# Altium PCB super cap2.PcbDoc
Units mm, origin at the board's own origin, x right, y up, seen from the top; angles counter-clockwise.
Board outline 40 x 41.5 mm, 2 copper layers (Top Layer, Bottom Layer), stack 0.325 mm thick; 54 components, 33 nets, 195 pads, 26 vias.
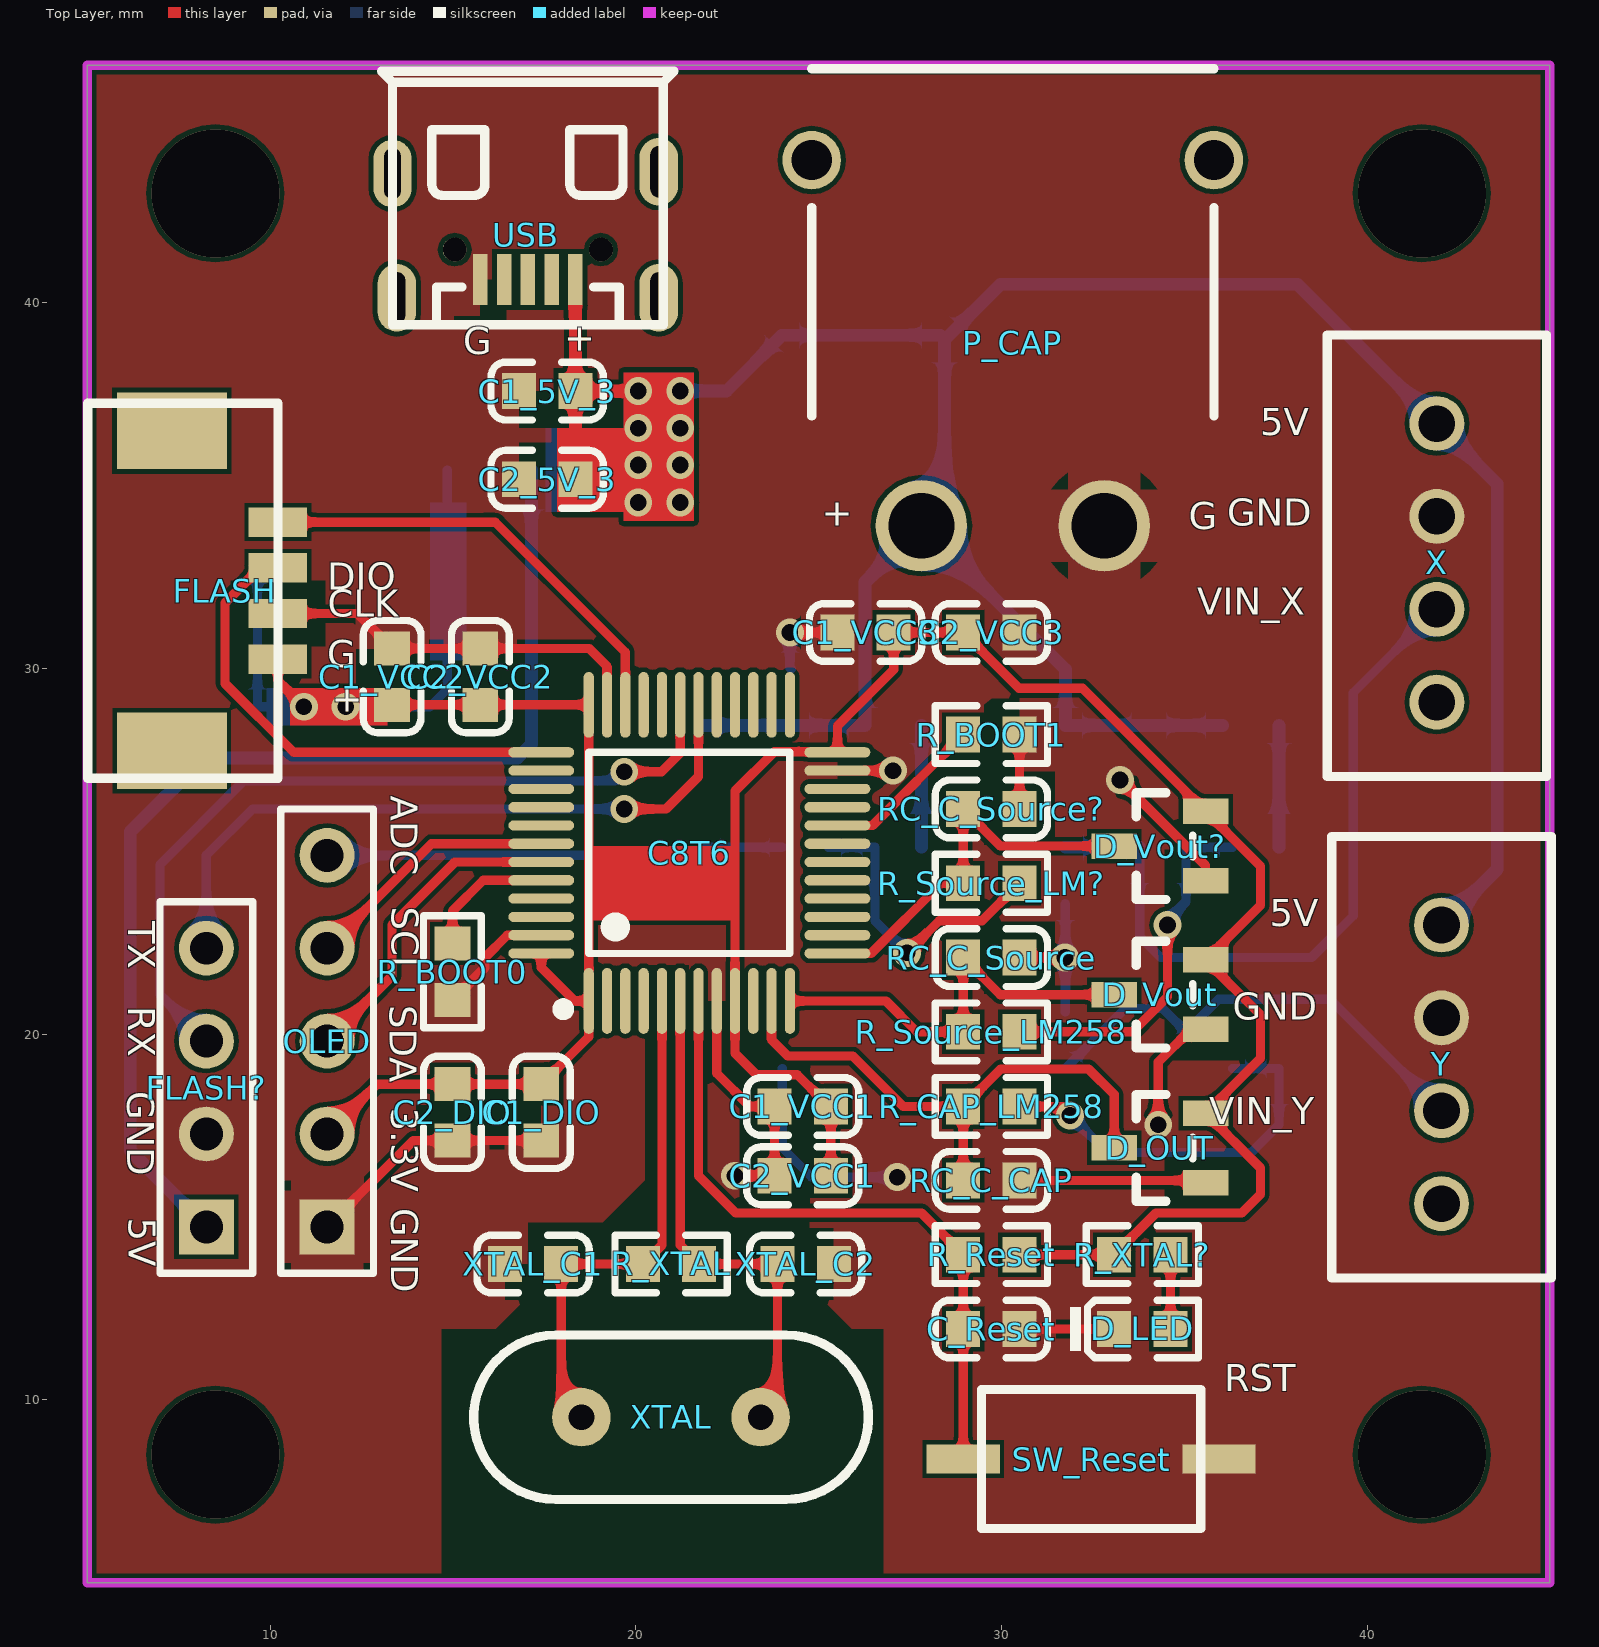
[diagram p0: Top Layer view]
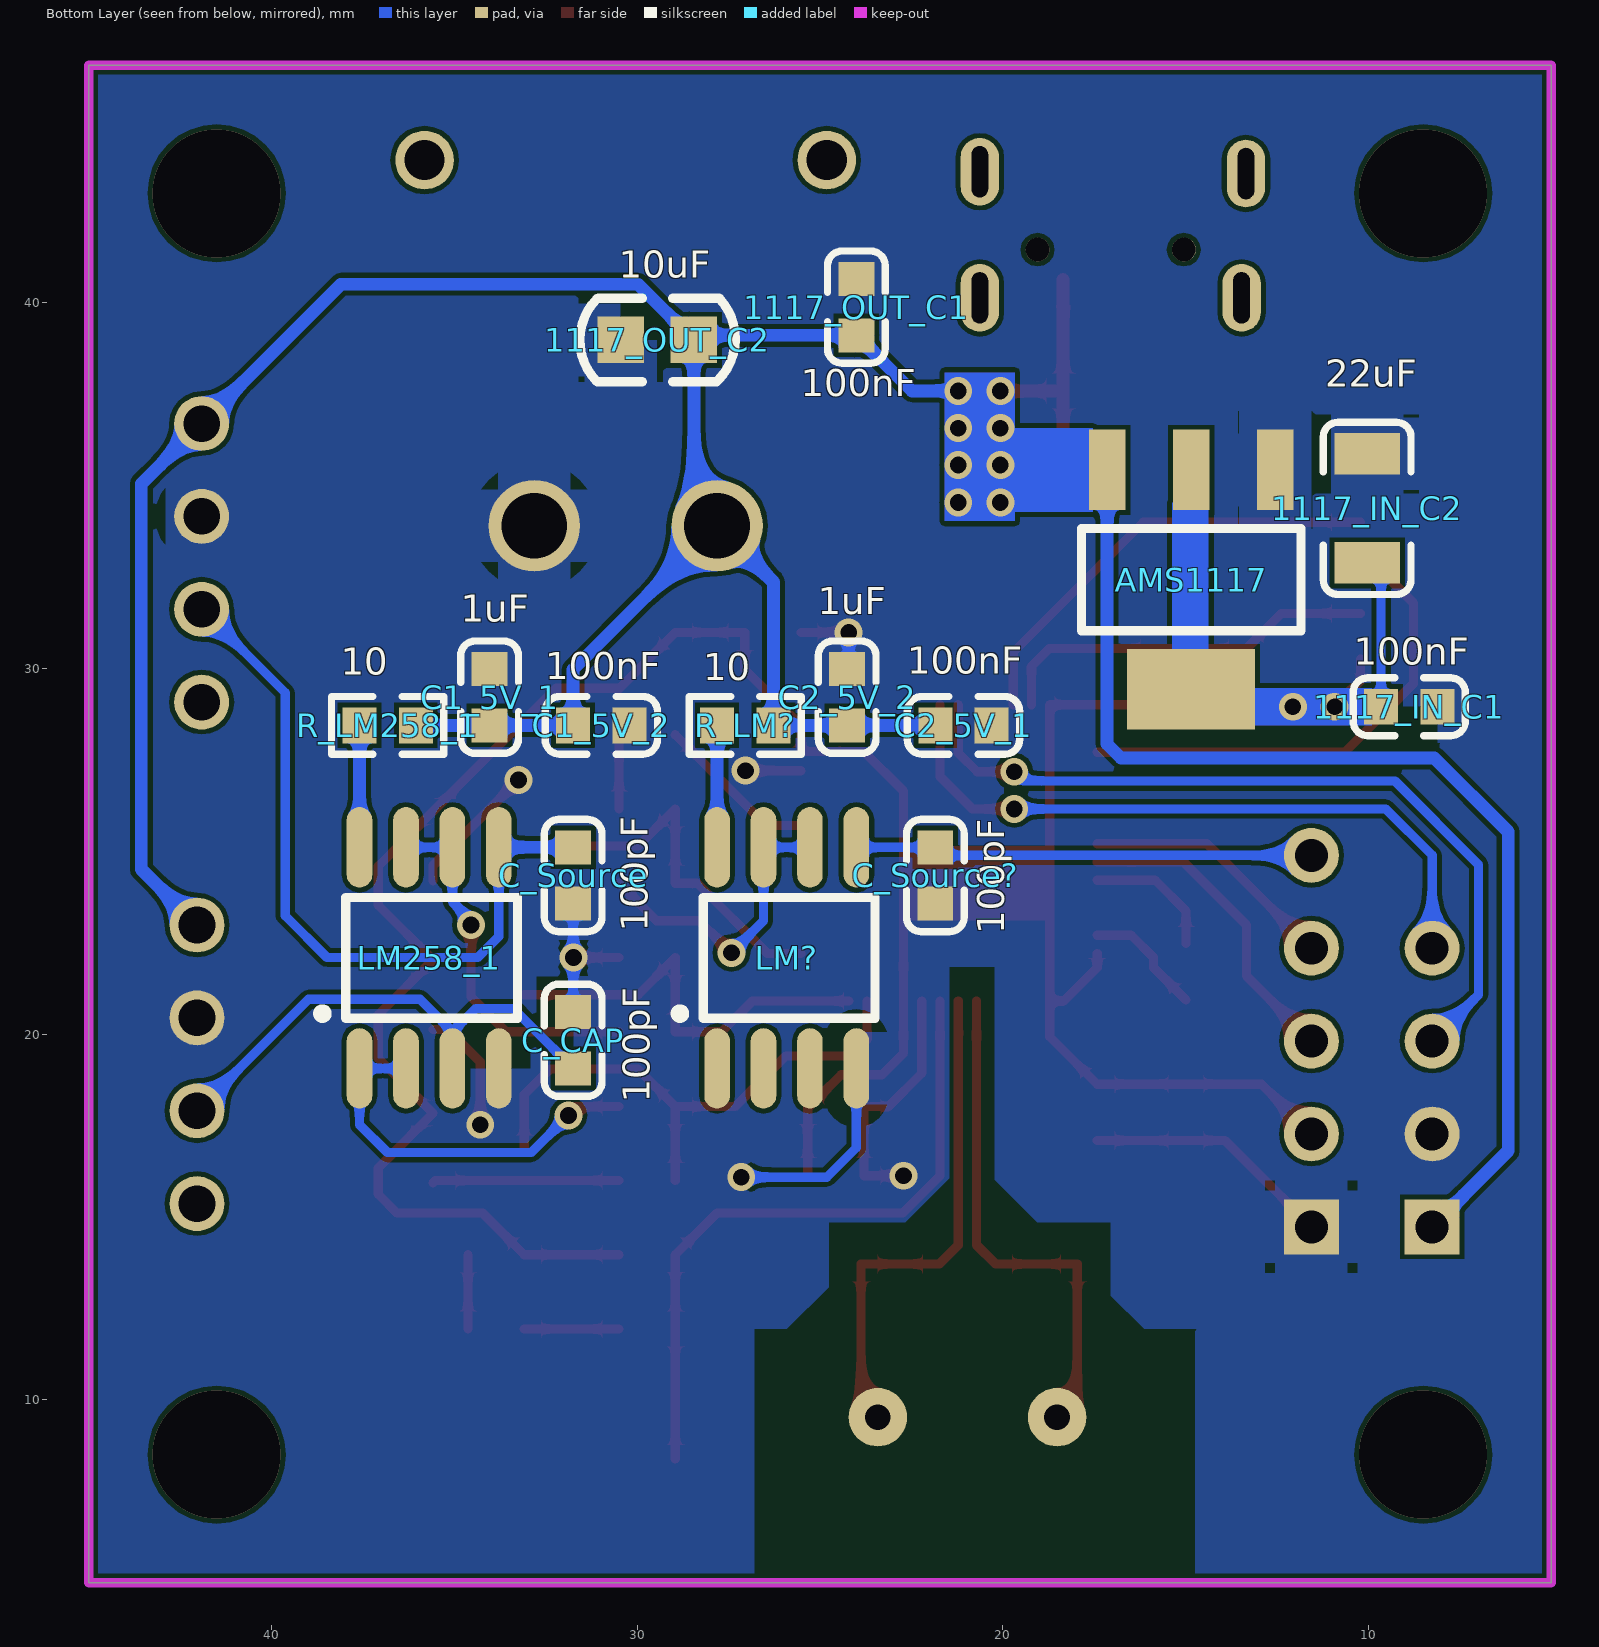
[diagram p1: Bottom Layer view, seen from below]
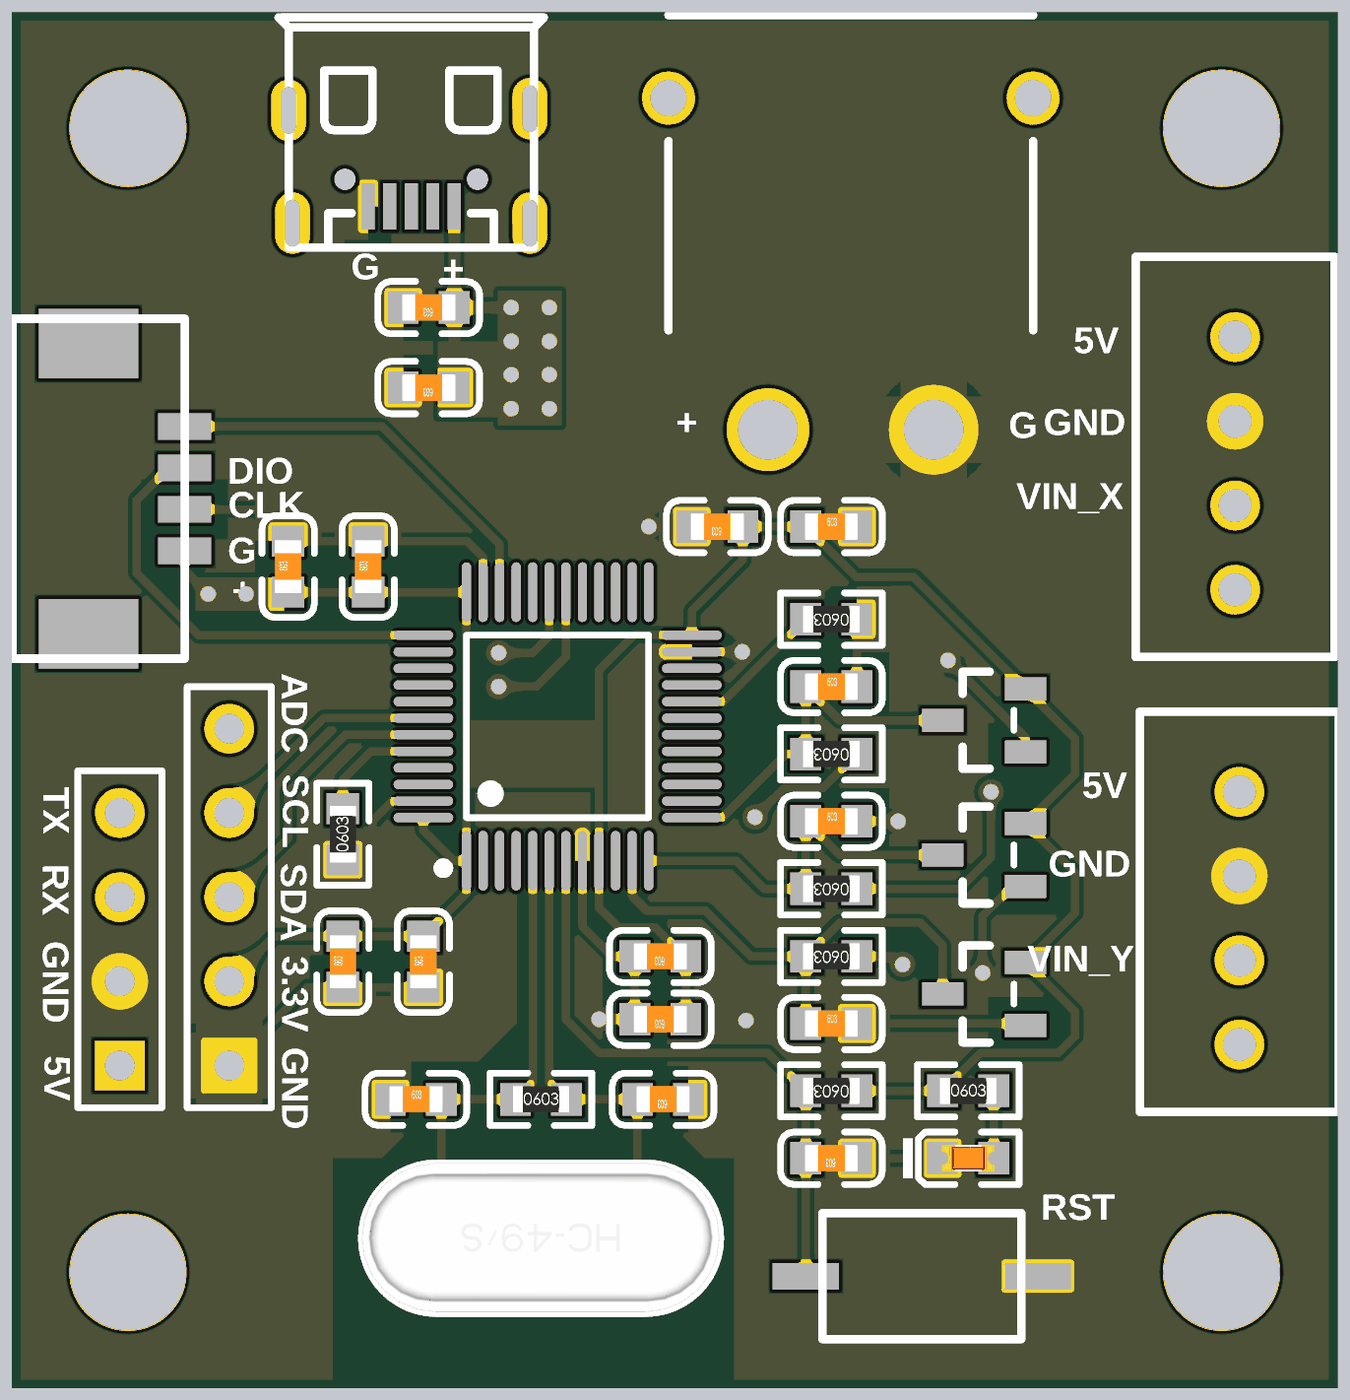
[diagram p2: 3D render of the assembled board from above, using the file's embedded part models]
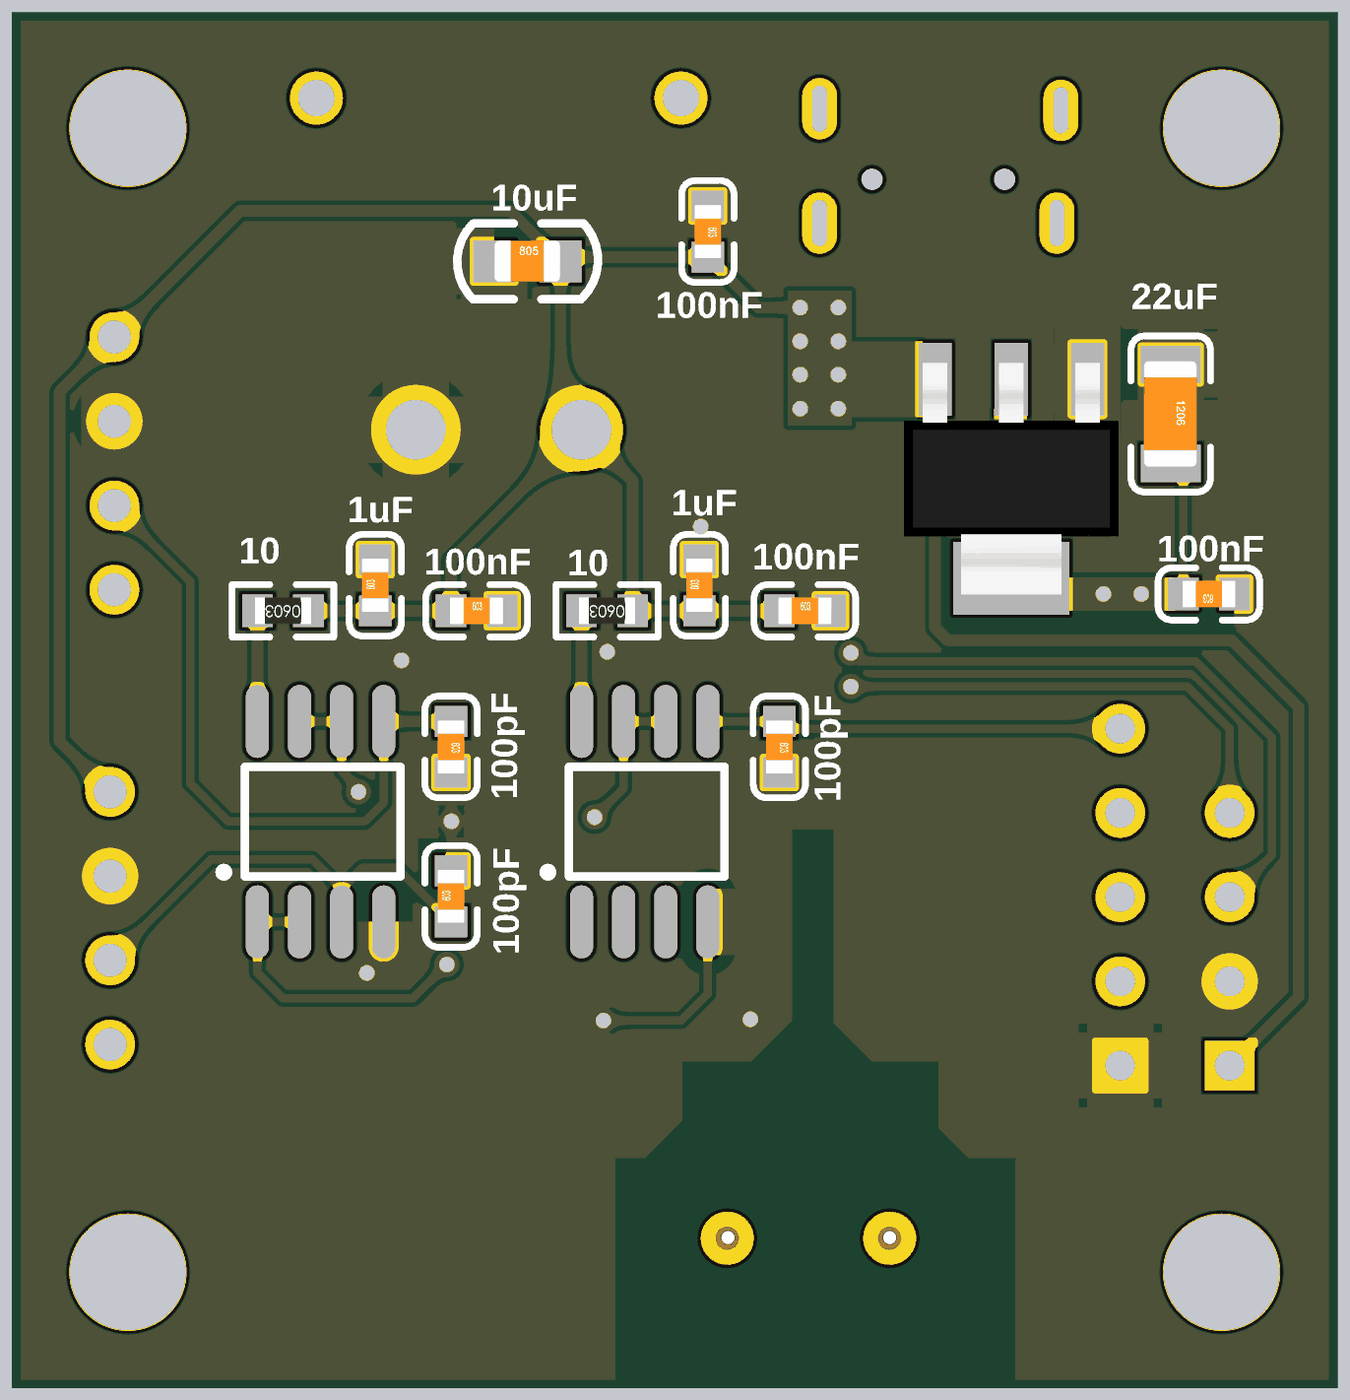
[diagram p3: 3D render of the assembled board from below, using the file's embedded part models]

## Layer stack, top to bottom
Top Solder: solder mask 0.0102, Solder Resist, Dk 3.5
Top Layer: signal copper 0.0356
Dielectric 1: core 0.254, FR-4, Dk 4.2
Bottom Layer: signal copper 0.0356
Bottom Solder: solder mask 0.0102, Solder Resist, Dk 3.5

## Board outline
5,5 5,46.5 45,46.5 45,5

## Design rules (kind name [scope] priority, off if disabled: settings)
Clearance [All] p1: gap=0.127 ignorepadtopadclearanceinfootprint=TRUE
DiffPairsRouting [All] p1: maxlimit=0.508 minlimit=0.508 mostfreqgap=0.508 toplayer_minwidth=0.381 toplayer_maxwidth=0.508 toplayer_prefwidth=0.508 bottomlayer_minwidth=0.381 bottomlayer_maxwidth=0.508 bottomlayer_prefwidth=0.508 maxuncoupledlength=12.7
PlaneConnect [All] p1: planeconnectstyle=Relief reliefexpansion=0.508 reliefentries=4 reliefconductorwidth=2 reliefairgap=0.508
PolygonConnect [All] p1: thpad.connectstyle=Relief thpad.reliefconductorwidth=2 thpad.reliefentries=4 thpad.polygonreliefangle="90 Angle" thpad.airgapwidth=0.508 smdpad.connectstyle=Relief smdpad.reliefconductorwidth=2 smdpad.reliefentries=4 smdpad.polygonreliefangle="90 Angle" smdpad.airgapwidth=0.508 via.connectstyle=Direct via.reliefconductorwidth=0.254 via.reliefentries=4 via.polygonreliefangle="90 Angle" via.airgapwidth=0.254
RoutingVias [All] p1: holewidth=0.711 width=1.27 viastyle="Through Hole" minholewidth=0.711 minwidth=1.27 maxholewidth=0.711 maxwidth=1.27
SolderMaskExpansion [All] p1: expansion=0.102
UnRoutedNet [All] p1: checkbadconnections=TRUE
Width [All] p1: maxlimit=5.08 minlimit=0.254 preferedwidth=0.254
27 further rules are at their usual default settings.

## Components (designator, comment, footprint, x,y, rotation, side; value= is the part's Value field where it differs from the comment)
1117_IN_C1 "100nF" LC-0603_C 8.882,28.956 r0 bottom value=0.1uF
1117_IN_C2 "22uF" LC-1206_C 10.033,34.383 r270 bottom value=0.1uF
1117_OUT_C1 "100nF" LC-0603_C 24.003,39.886 r270 bottom
1117_OUT_C2 "10uF" C0805_2 30.649,38.986 r180 bottom value=0.1uF
AMS1117 "AMS1117-3.3" LC-SOT-223 14.845,32.433 r90 bottom
C1_5V_1 "1uF" LC-0603_C 34.036,29.218 r90 bottom value=0.1uF
C1_5V_2 "100nF" LC-0603_C 30.98,28.448 r180 bottom value=0.1uF
C1_5V_3 "100nF" LC-0603_C 17.578,37.592 r180 top value=0.1uF
C1_DIO "1uF" LC-0603_C 17.415,17.865 r90 top value=22uF
C1_VCC1 "100nF" LC-0603_C 24.567,18.025 r180 top value=0.1uF
C1_VCC2 "100nF" LC-0603_C 13.335,29.78 r90 top value=0.1uF
C1_VCC3 "100nF" LC-0603_C 26.285,30.988 r180 top value=0.1uF
C2_5V_1 "100nF" LC-0603_C 21.074,28.448 r180 bottom value=0.1uF
C2_5V_2 "1uF" LC-0603_C 24.257,29.218 r90 bottom value=0.1uF
C2_5V_3 "1uF" LC-0603_C 17.578,35.179 r180 top value=0.1uF
C2_DIO "100nF" LC-0603_C 14.986,17.865 r90 top value=22uF
C2_VCC1 "1uF" LC-0603_C 24.567,16.129 r180 top value=0.1uF
C2_VCC2 "1uF" LC-0603_C 15.748,29.78 r90 top value=0.1uF
C2_VCC3 "1uF" LC-0603_C 29.726,30.988 r0 top value=0.1uF
C8T6 "STM32F103C8T6" LQFP-48_7X7X05P 21.509,24.974 r90 top
C_CAP "100pF" LC-0603_C 31.75,19.836 r90 bottom value=0.1uF
C_Reset "1uF" LC-0603_C 29.726,11.938 r180 top value=0.1uF
C_Source "100pF" LC-0603_C 31.75,24.342 r270 bottom value=0.1uF
C_Source? "100pF" LC-0603_C 21.844,24.342 r270 bottom value=0.1uF
D_LED "LED" LC-0603_LED_S1 33.856,11.938 r0 top
D_OUT "BAS21S" SOT-23(SOT-23-3) 34.336,16.891 r90 top
D_Vout "BAS21S" SOT-23(SOT-23-3) 34.336,21.082 r90 top
D_Vout? "BAS21S" SOT-23(SOT-23-3) 34.336,25.146 r90 top
FLASH "4P_S" A1251WR-S-4P 8.763,32.131 r270 top
FLASH? "4P_S" 排针_4P 8.255,14.732 r90 top
LM258_1 "LM258D" SOIC-8_150mil 35.687,22.089 r90 bottom
LM? "LM258D" SOIC-8_150mil 25.908,22.089 r90 bottom
OLED "5P_S" 排针1*5 11.557,14.732 r90 top
P_CAP "XT60" XT30_卧式_公头 27.813,33.909 r0 top
R_BOOT0 "10K" LC-0603_R 14.986,21.709 r90 top
R_BOOT1 "10K" LC-0603_R 29.726,28.194 r180 top
R_CAP_LM258 "10K" LC-0603_R 29.726,18.025 r180 top
R_LM258_1 "10" LC-0603_R 36.822,28.448 r0 bottom
R_LM? "10" LC-0603_R 27.043,28.448 r0 bottom
R_Reset "10K" LC-0603_R 29.726,13.97 r180 top
R_Source_LM258 "10K" LC-0603_R 29.726,20.066 r180 top
R_Source_LM? "10K" LC-0603_R 29.726,24.13 r180 top
R_XTAL "1M" LC-0603_R 20.965,13.716 r0 top
R_XTAL? "10K" LC-0603_R 33.856,13.97 r0 top
RC_C_CAP "100nF" LC-0603_C 29.726,16.002 r0 top value=0.1uF
RC_C_Source "100nF" LC-0603_C 29.726,22.098 r0 top value=0.1uF
RC_C_Source? "100nF" LC-0603_C 29.726,26.162 r0 top value=0.1uF
SW_Reset "SW" SW 32.456,8.382 r0 top
USB "U254-051N-4BH806" U254-051N-4BH806 16.988,41.865 r180 top
X "4P_S" XH2.54-4P 41.91,32.893 r270 top
XTAL "8M" HC-49S 20.965,9.525 r180 top
XTAL_C1 "22pF" LC-0603_C 17.191,13.716 r0 top value=0.1uF
XTAL_C2 "22pF" LC-0603_C 24.646,13.716 r180 top value=0.1uF
Y "4P_S" XH2.54-4P 42.037,19.177 r270 top

## Footprints (in the part's own frame and the unit in brackets; to place one, negate y for a bottom-side part, rotate by r counter-clockwise, add the part's x,y. Pads: shape width x height; smd on the part's side, far side on the other; paste and mask are expansions set on the pad)
A1251WR-S-4P [mm]
  rect 0.8x1.6 smd: 1(-1.875,1.45) 2(-0.625,1.45) 3(0.625,1.45) 4(1.875,1.45)
  rect 2.1x3 smd: 5(-4.375,-1.45) 6(4.375,-1.45)
  silkscreen extent -5.13,-3.75 5.13,1.45
C0805_2 [mm]
  rect 1.27x1.27 smd: 1(0.201,0.003) 2(2.201,0.003)
  silkscreen extent -0.92,-1.14 3.33,1.14, body extent 0.2,-0.62 2.2,0.63, height 1.21
HC-49S [mm]
  round 1.6 hole 0.7: 1(-2.45,0) 2(2.45,0)
  silkscreen extent -5.39,-2.25 5.39,2.25, body extent -5.39,-2.27 5.41,2.23, height 3.6
LC-0603_C [mm]
  rect 0.93x0.98 smd: 1(-0.77,0) 2(0.77,0)
  silkscreen extent -1.53,-0.79 1.54,0.79, body extent -0.8,-0.4 0.8,0.4, height 0.3
LC-0603_LED_S1 [mm]
  rect 0.93x0.98 smd: A(0.77,0) K(-0.77,0)
  silkscreen extent -1.98,-0.79 1.53,0.79, body extent -0.8,-0.4 0.8,0.4, height 0.6
LC-0603_R [mm]
  rect 0.93x0.98 smd: 1(-0.77,0) 2(0.77,0)
  silkscreen extent -1.53,-0.79 1.54,0.79, body extent -0.85,-0.4 0.85,0.4, height 0.56
LC-1206_C [mm]
  rect 1.13x1.8 smd: 1(-1.49,0) 2(1.49,0)
  silkscreen extent -2.36,-1.2 2.35,1.2, body extent -1.6,-0.81 1.6,0.79, height 1
LC-SOT-223 [mm]
  rect 2.2x1 smd: 1(3,-2.3) 2(3,0) 3(3,2.3)
  rect 2.2x3.5 smd: 2(-3,0)
  silkscreen extent -1.4,-3 1.4,3, body extent -3.49,-3.24 3.49,3.24, height 1.64
LQFP-48_7X7X05P [mm]
  oval 1.8x0.28 smd: 1(-4.064,2.794) 2(-4.064,2.294) 3(-4.064,1.794) 4(-4.064,1.294) 5(-4.064,0.794) 6(-4.064,0.294) 7(-4.064,-0.206) 8(-4.064,-0.706) 9(-4.064,-1.206) 10(-4.064,-1.706) 11(-4.064,-2.206) 12(-4.064,-2.706) 25(4.036,-2.706) 26(4.036,-2.206) 27(4.036,-1.706) 28(4.036,-1.206) 29(4.036,-0.706) 30(4.036,-0.206) 31(4.036,0.294) 32(4.036,0.794) 33(4.036,1.294) 34(4.036,1.794) 35(4.036,2.294) 36(4.036,2.794)
  oval 0.28x1.8 smd: 13(-2.764,-4.006) 14(-2.264,-4.006) 15(-1.764,-4.006) 16(-1.264,-4.006) 17(-0.764,-4.006) 18(-0.264,-4.006) 19(0.236,-4.006) 20(0.736,-4.006) 21(1.236,-4.006) 22(1.736,-4.006) 23(2.236,-4.006) 24(2.736,-4.006) 37(2.736,4.094) 38(2.236,4.094) 39(1.736,4.094) 40(1.236,4.094) 41(0.736,4.094) 42(0.236,4.094) 43(-0.264,4.094) 44(-0.764,4.094) 45(-1.264,4.094) 46(-1.764,4.094) 47(-2.264,4.094) 48(-2.764,4.094)
  silkscreen extent -4.44,-2.71 2.74,3.64
SOIC-8_150mil [mm]
  oval 2.2x0.7 smd: 1(-3.023,1.905) 2(-3.023,0.635) 3(-3.023,-0.635) 4(-3.023,-1.905) 5(3.023,-1.905) 6(3.023,-0.635) 7(3.023,0.635) 8(3.023,1.905)
  silkscreen extent -1.65,-2.41 1.65,3.05
SOT-23(SOT-23-3) [mm]
  rect 0.7x1.25 smd: 1(-0.95,-1.25) 2(0.95,-1.25) 3(0,1.25)
  silkscreen extent -1.46,-0.9 1.46,0.65
SW [mm]
  rect 2x0.8 smd: 1(-3.5,0) 2(3.5,0)
  silkscreen extent -3,-1.9 3,1.9, body extent -2.92,-1.78 2.92,1.78, height 1.8
U254-051N-4BH806 [mm]
  rect 0.4x1.4 smd: 1(-1.36,1.225) 2(-0.71,1.225) 3(-0.06,1.225) 4(0.59,1.225) 5(1.24,1.225)
  oval 1.05x1.85 hole 0.45 slot 1.4 at 90 deg: 6(-3.64,1.725) 7(-3.64,-1.725) 8(3.52,1.725) 9(3.64,-1.675)
  round 0.65 hole 0.65 unplated: ""(-2.06,0.405) ""(1.94,0.405)
  silkscreen extent -4.06,-4.47 3.94,2.46
XH2.54-4P [mm]
  round 1.5 hole 1: 1(-3.81,0) 2(-1.27,0) 3(1.27,0) 4(3.81,0)
  silkscreen extent -6.23,-3 5.84,3
XT30_卧式_公头 [mm]
  round 2.5 hole 1.8: 1(0,0) 2(5,0)
  round 1.6 hole 1.1: -(-3,10) -(8,10)
  silkscreen extent -3,3 8,12.5
排针1*5 [mm]
  rect 1.5x1.5 hole 0.9: 1(0,0)
  round 1.5 hole 0.9: 2(2.54,0) 3(5.08,0) 4(7.62,0) 5(10.16,0)
  silkscreen extent -1.27,-1.27 11.43,1.27
排针_4P [mm]
  rect 1.5x1.5 hole 0.9: 1(0,0)
  round 1.5 hole 0.9: 2(2.54,0) 3(5.08,0) 4(7.62,0)
  silkscreen extent -1.27,-1.27 8.89,1.27

## Part data
1117_IN_C1 1117_IN_C2 1117_OUT_C2 C1_5V_1 C1_5V_2 C1_5V_3 C1_VCC1 C1_VCC2 C1_VCC3 C2_5V_1 C2_5V_2 C2_5V_3 C2_VCC1 C2_VCC2 C2_VCC3 C_CAP C_Reset C_Source C_Source? RC_C_CAP RC_C_Source RC_C_Source? XTAL_C1 XTAL_C2: library part C1608X7R1E104K080AA, "CAP CER 0.1UF 25V X7R 0603", Device Package="0603 (1608 Metric)", Manufacturer="TDK Corporation", Supplier Part Number 1=445-1316-1-ND, TemperatureCoefficient=X7R, TemperatureRange="-55C ~ 125C", Tolerance=10%, Voltage=25V, ComponentLink1Description=Datasheet, ComponentLink1URL=https://product.tdk.com/info/en/catalog/datasheets/mlcc_commercial_general_en.pdf, ComponentLink2Description="Digi-Key listing", ComponentLink2URL=http://digikey.com/product-detail/en/C1608X7R1E104K080AA/445-1316-1-ND/567697, PartId=4029, Part Number=C1608X7R1E104K080AA, Price=0.14, Supplier 1=Digi-Key, Type=-
1117_OUT_C1: library part "0603 1.5nF (152) 10% 50V", "贴片电容", Package=0603, SuppliersPartNumber=C1595, ComponentLink1Description=供?, ComponentLink1URL=http://www.szlcsc.com/product/details_1947.html, Supplier=LC
C1_DIO C2_DIO: library part C1608X5R0J226M080AC, "CAP CER 22UF 6.3V X5R 0603", Device Package="0603 (1608 Metric)", Manufacturer="TDK Corporation", Supplier Part Number 1=445-8028-2-ND, TemperatureCoefficient=X5R, TemperatureRange="-55C ~ 85C", Tolerance=20%, Voltage=6.3V, ComponentLink1Description=Datasheet, ComponentLink1URL=https://product.tdk.com/info/en/catalog/datasheets/mlcc_commercial_general_en.pdf, ComponentLink2Description="Digi-Key Listing", ComponentLink2URL=https://www.digikey.com/product-detail/en/tdk-corporation/C1608X5R0J226M080AC/445-8028-2-ND/2792254, PartId=12992, Part Number=C1608X5R0J226M080AC, Price=0.0816, Supplier 1=Digi-Key
C8T6: BOM_Manufacturer=ST, BOM_Manufacturer Part=STM32F103C8T6, BOM_Supplier=LCSC, BOM_Supplier Part=C8734, image=http://image.lceda.cn/szlcsc/C8734.jpg, spicePre=U, subpart_no=2, tags=STM32, timeStamp=1455028086
D_OUT D_Vout D_Vout?: BOM_LCSC Assembly=Yes, BOM_Manufacturer=CJ, BOM_Manufacturer Part=BAS21S, BOM_Supplier=LCSC, BOM_Supplier Part=C68966, spicePre=D
P_CAP: library part XT60PW
R_BOOT0 R_BOOT1 R_LM258_1 R_LM? R_Reset R_XTAL R_XTAL?: library part Res2, "Resistor", LatestRevisionDate=17-Jul-2002, LatestRevisionNote="Re-released for DXP Platform.", PackageReference=0805R, Published=8-Jun-2000, Publisher="Altium Limited"
R_CAP_LM258 R_Source_LM258 R_Source_LM?: library part "0603 5.1Ω (5R10) 1%", "贴片电阻", Package=0603, SuppliersPartNumber=C25197, ComponentLink1Description=供?, ComponentLink1URL=http://www.szlcsc.com/product/details_25940.html, Supplier=LC
USB: BOM_Manufacturer="XKB Enterprise", BOM_Manufacturer Part=U254-051N-4BH806, BOM_Supplier=LCSC, BOM_Supplier Part=C319170, Contributor=LCSC, spicePre=U
XTAL: library part XTAL

## Via types
v1: diameter 0.762, hole 0.457, Top Layer to Bottom Layer, tented both sides, 22 vias
v2: diameter 3.5, hole 3.5, Top Layer to Bottom Layer, 4 vias

## Nets (pads, with @x,y where several pads share a name; then routed paths per layer and width w, separated by ;. In a path a pad name is that pad's centre, name@x,y a point inside that pad or via, vN(x,y) a via of type N, cw(c..) or ccw(c..) an arc to the next point about the centre after c; other vN are vias at no path point)
ADC: C_Source?.1 LM?.5 OLED.5 | length 12.5
  Bottom Layer w0.254: OLED.5 21.624,24.892 C_Source?.1 LM?.5
ADC_OLED: C8T6.13 D_Vout?.3 R_Source_LM?.2 RC_C_Source?.1 | length 10.8
  Top Layer w0.254: C8T6.13 26.435,22.21 28.355,24.13 R_Source_LM?.2 RC_C_Source?.1 29.972,25.146 D_Vout?.3
ADC_X: C8T6.12 D_Vout.3 R_Source_LM258.2 RC_C_Source.1 | length 11.7
  Top Layer w0.254: C8T6.12 26.842,20.91 27.686,20.066 R_Source_LM258.2 RC_C_Source.1 29.972,21.082 D_Vout.3
ADC_Y: C8T6.11 D_OUT.3 R_CAP_LM258.2 RC_C_CAP.1 | length 15.4
  Top Layer w0.254: C8T6.11 23.715,19.846 24.157,19.404 25.935,19.404 27.314,18.025 R_CAP_LM258.2 ; RC_C_CAP.1 R_CAP_LM258.2 ; D_OUT.3 33.086,18.349 32.385,19.05 29.981,19.05 R_CAP_LM258.2
DDGND: 
DGND: 1117_IN_C1.1 1117_IN_C2.1 1117_OUT_C1.1 1117_OUT_C2.1 AMS1117.1 C1_5V_1.2 C1_5V_2.2 C1_5V_3.2 C1_DIO.1 C1_VCC1.2 C1_VCC2.2 C1_VCC3.2 C2_5V_1.2 C2_5V_2.2 C2_5V_3.2 C2_DIO.1 C2_VCC1.2 C2_VCC2.2 C2_VCC3.2 C8T6.8 C8T6.23 C8T6.35 C8T6.47 C_CAP.2 C_Reset.1 C_Source.2 C_Source?.2 D_LED.K D_OUT.1 D_Vout.1 D_Vout?.1 FLASH.3 FLASH?.2 LM258_1.4 LM?.4 OLED.1 P_CAP.2 R_BOOT0.1 R_BOOT1.1 RC_C_CAP.2 RC_C_Source.2 RC_C_Source?.2 SW_Reset.2 USB.5 X.2 XTAL_C1.1 XTAL_C2.1 Y.2 | length 58.3
  Top Layer w0.254: FLASH.3 12.379,31.506 C1_VCC2.2 C2_VCC2.2 18.726,30.55 19.215,30.061 C8T6.35 ; OLED.1 13.92,17.095 C2_DIO.1 C1_DIO.1 ; R_BOOT0.1 15.875,21.828 15.875,22.098 16.487,22.71 C8T6.47 ; C8T6.8 22.215,18.933 23.123,18.025 C1_VCC1.2 C2_VCC1.2 v1(22.717,16.129) ; v1(24.215,30.988) C1_VCC3.2 ; C8T6.23 v1(27.036,27.21) ; C_Reset.1 D_LED.K ; RC_C_CAP.2 35.524,16.002 D_OUT.1 ; RC_C_Source.2 v1(31.741,22.098) ; RC_C_Source?.2 R_BOOT1.1 ; v1(33.246,26.952) 35.585,24.613 D_Vout?.1 ; v1(34.29,17.526) 34.29,19.238 35.184,20.132 D_Vout.1
  Bottom Layer w0.254: LM?.4 24.003,16.898 24.81,16.091 v1(27.153,16.091) ; v1(24.215,30.988) 24.215,30.03 C2_5V_2.2 ; C_CAP.2 C_Source.2
I2C_SCL: C8T6.42 OLED.4 | length 7
  Top Layer w0.254: OLED.4 14.415,25.21 C8T6.42
I2C_SDA: C8T6.43 OLED.3 | length 8.7
  Top Layer w0.254: OLED.3 13.335,21.59 13.335,22.987 15.058,24.71 C8T6.43
NetC8T6_5: C8T6.5 R_XTAL.1 XTAL.2 XTAL_C1.2 | length 14.1
  Top Layer w0.254: XTAL.2 17.961,10.079 XTAL_C1.2 R_XTAL.1 20.715,14.236 C8T6.5
NetC8T6_6: C8T6.6 R_XTAL.2 XTAL.1 XTAL_C2.2 | length 13.9
  Top Layer w0.254: C8T6.6 21.215,14.236 R_XTAL.2 XTAL_C2.2 23.876,9.986 XTAL.1
NetC8T6_7: C8T6.7 C_Reset.2 R_Reset.2 SW_Reset.1 | length 18.5
  Top Layer w0.254: C8T6.7 21.715,16.131 22.733,15.113 27.813,15.113 R_Reset.2 C_Reset.2 SW_Reset.1
NetC8T6_20: C8T6.20 R_BOOT1.2 | length 4.5
  Top Layer w0.254: C8T6.20 26.472,25.71 R_BOOT1.2
NetC8T6_44: C8T6.44 R_BOOT0.2 | length 3.7
  Top Layer w0.254: R_BOOT0.2 14.986,23.368 15.828,24.21 C8T6.44
NetD_LED_2: D_LED.A R_XTAL?.2 | length 2
  Top Layer w0.254: D_LED.A R_XTAL?.2
NetLM258_1_1: LM258_1.1 LM258_1.2 R_CAP_LM258.1 | length 10.7
  Top Layer w0.254: R_CAP_LM258.1 31.632,18.025 v1(31.877,17.78)
  Bottom Layer w0.254: v1(31.877,17.78) 32.893,16.764 36.83,16.764 37.592,17.526 LM258_1.1 LM258_1.2
NetLM258_1_6: LM258_1.6 LM258_1.7 R_Source_LM258.1 | length 10
  Top Layer w0.254: R_Source_LM258.1 33.584,20.066 34.544,21.026 v1(34.544,22.987)
  Bottom Layer w0.254: v1(34.544,22.987) 34.544,23.114 35.052,23.622 LM258_1.6 LM258_1.7
NetLM258_1_8: LM258_1.8 R_LM258_1.2 | length 3.3
  Bottom Layer w0.35: LM258_1.8 R_LM258_1.2
NetLM?_6: LM?.6 LM?.7 R_Source_LM?.1 | length 8.4
  Top Layer w0.254: v1(27.42,22.225) 28.297,23.102 29.468,23.102 R_Source_LM?.1
  Bottom Layer w0.254: LM?.6 LM?.7 26.543,23.102 v1(27.42,22.225)
NetLM?_8: LM?.8 R_LM?.2 | length 3.3
  Bottom Layer w0.35: LM?.8 R_LM?.2
PB10: 
PB11: 
PB12: 
PB13: 
PB14: 
PB15: 
SWCLK: C8T6.37 FLASH.2 | length 13.5
  Top Layer w0.254: FLASH.2 9.724,32.756 8.763,31.795 8.763,29.591 10.644,27.71 C8T6.37
SWDIO: C8T6.34 FLASH.1 | length 12.4
  Top Layer w0.254: FLASH.1 16.159,34.006 19.715,30.45 C8T6.34
USART_RX: C8T6.31 FLASH?.3 | length 22.2
  Top Layer w0.254: v1(19.685,27.178) 20.701,27.178 21.215,27.692 C8T6.31
  Bottom Layer w0.254: FLASH?.3 6.985,21.082 6.985,24.638 9.271,26.924 19.431,26.924 v1(19.685,27.178)
USART_TX: C8T6.30 FLASH?.4 | length 18.9
  Top Layer w0.254: v1(19.685,26.162) 20.828,26.162 21.715,27.049 C8T6.30
  Bottom Layer w0.254: FLASH?.4 8.255,24.892 9.525,26.162 v1(19.685,26.162)
VCC: 1117_IN_C1.2 1117_IN_C2.2 AMS1117.2 C1_DIO.2 C1_VCC1.1 C1_VCC2.1 C1_VCC3.1 C2_DIO.2 C2_VCC1.1 C2_VCC2.1 C2_VCC3.1 C8T6.1 C8T6.9 C8T6.24 C8T6.36 C8T6.48 D_OUT.2 D_Vout.2 D_Vout?.2 FLASH.4 OLED.2 R_Reset.1 R_XTAL?.1 | length 94
  Top Layer w0.254: FLASH.4 10.213,29.665 v1(10.922,28.956) v1(12.065,28.956) 12.119,29.01 C1_VCC2.1 C2_VCC2.1 C8T6.36 C8T6.1 ; OLED.2 12.92,18.635 C2_DIO.2 C1_DIO.2 18.715,19.935 C8T6.1 ; C8T6.48 17.415,21.828 18.333,20.91 C8T6.1 ; C2_VCC1.1 C1_VCC1.1 25.29,18.025 24.419,18.896 23.302,18.896 22.715,19.483 C8T6.9 22.715,26.652 23.792,27.729 24.431,27.729 24.433,27.731 25.515,27.731 25.515,28.436 27.055,29.976 C1_VCC3.1 C2_VCC3.1 30.48,29.464 32.217,29.464 D_Vout?.2 37.084,24.597 37.084,23.531 D_Vout.2 37.084,20.533 37.084,19.34 D_OUT.2 37.084,16.342 37.084,15.621 36.576,15.113 34.229,15.113 R_XTAL?.1 R_Reset.1
  Bottom Layer w0.254: 1117_IN_C2.2 9.652,32.512 1117_IN_C1.2 v1(10.922,28.956) ; v1(12.065,28.956) 14.368,28.956 14.845,29.433 AMS1117.2@14.845,35.433
VCC_5V: 1117_OUT_C1.2 1117_OUT_C2.2 AMS1117.3 C1_5V_1.1 C1_5V_2.1 C1_5V_3.1 C2_5V_1.1 C2_5V_2.1 C2_5V_3.1 FLASH?.1 P_CAP.1 R_LM258_1.1 R_LM?.1 USB.1 X.1 Y.1 | length 105.7
  Top Layer w0.35: C2_5V_3.1 C1_5V_3.1 ; USB.1 C1_5V_3.1 ; v1(20.066,37.592) C1_5V_3.1
  Bottom Layer w0.35: FLASH?.1 6.175,16.812 6.175,25.536 8.199,27.559 16.764,27.559 17.145,27.94 AMS1117.3 ; v1(20.066,37.592) v1(21.215,37.592) 22.479,37.592 1117_OUT_C1.2 28.321,39.116 1117_OUT_C2.2 ; v1@20.193,35.433 20.447,35.179 ; C2_5V_1.1 C2_5V_2.1 R_LM?.1 26.273,32.369 P_CAP.1 ; R_LM258_1.1 C1_5V_1.1 C1_5V_2.1 31.75,29.972 P_CAP.1 ; Y.1 43.561,24.511 43.561,35.052 X.1 38.1,40.513 29.972,40.513 1117_OUT_C2.2 ; P_CAP.1 28.448,34.544 1117_OUT_C2.2
  other v1: 20.066,34.544 21.215,34.544 20.066,35.569 21.215,35.569 20.066,36.576 21.215,36.576
Vin_X: C_Source.1 LM258_1.5 X.3 | length 20.4
  Bottom Layer w0.254: LM258_1.5 33.782,22.671 34.355,22.098 38.481,22.098 39.624,23.241 39.624,29.337 X.3
  Bottom Layer w0.35: C_Source.1 LM258_1.5
Vin_Y: C_CAP.1 LM258_1.3 Y.3 | length 12.9
  Bottom Layer w0.254: C_CAP.1 33.385,20.701 34.417,20.701 35.052,20.066 35.941,20.955 38.989,20.955 Y.3
pads on no net: C8T6.2 C8T6.3 C8T6.4 C8T6.10 C8T6.14 C8T6.15 C8T6.16 C8T6.17 C8T6.18 C8T6.19 C8T6.21 C8T6.22 C8T6.25 C8T6.26 C8T6.27 C8T6.28 C8T6.29 C8T6.32 C8T6.33 C8T6.38 C8T6.39 C8T6.40 C8T6.41 C8T6.45 C8T6.46 FLASH.5 FLASH.6 LM?.1 LM?.2 LM?.3 P_CAP.- USB. USB.2 USB.3 USB.4 USB.6 USB.7 USB.8 USB.9 X.4 Y.4
copper on no net:
  other v2: 8.5,8.5 41.5,8.5 8.5,43 41.5,43

## Polygon pours and split planes (outlines as drawn)
DGND on Top Layer "DGND_L01_P029" (solid, remove dead copper, pour order 29): 5,5 5,46.5 45,46.5 45,5
DGND on Bottom Layer "DGND_L02_P030" (solid, remove dead copper, pour order 30): 5,5 5,46.5 45,46.5 45,5

## Keep-outs
Keep-Out Layer:
  lines w0.254: 5,46.482 5,5 45,5 45,46.5 5,46.5

## Other copper
Top Layer:
  rectangle net VCC_5V: 17.845,34.283 19.939,36.576
  rectangle net VCC_5V: 19.666,34.036 21.59,38.1
  rectangle net VCC: 10.541,28.448 13.208,29.464
  rectangle net VCC: 18.715,23.114 22.715,25.146
  pour cut-out: 26.797,5 26.786,5.011 26.786,11.938 25.908,11.938 24.765,13.081 24.765,14.859 22.67,14.859 21.463,16.065 21.463,21.9 20.241,21.9 20.241,16.009 19.091,14.859 17.04,14.859 17.04,12.808 16.17,11.938 14.682,11.938 14.682,5.05 14.732,5
Bottom Layer:
  rectangle net VCC_5V: 17.526,34.29 20.304,36.576
  rectangle net VCC_5V: 19.666,34.036 21.59,38.1
  rectangle net VCC: 14.368,30.226 15.367,34.544
  rectangle net VCC: 9.906,28.448 13.208,29.464
  pour cut-out: 26.797,5 26.797,11.938 25.908,11.938 24.765,13.081 24.765,14.859 22.669,14.859 21.463,16.066 21.463,21.844 20.215,21.844 20.215,16.024 19.05,14.859 17.04,14.859 17.04,12.849 16.129,11.938 14.675,11.938 14.732,11.881 14.732,5
  pour cut-out: 13.589,5

## Silkscreen, mask and mechanical layers (free items; w line width, h text height)
Top Overlay:
  text "+" at 18.04,38.443 h1.27
  text "G" at 15.281,38.354 h1.27
  text "5V" at 37.084,36.141 h1.27
  text "+" at 25.088,33.659 h1.27
  text "GND" at 36.174,33.659 h1.27
  text "G" at 35.124,33.57 h1.27
  text "DIO" at 11.557,33.147 h1.27 r180
  text "VIN_X" at 35.359,31.234 h1.27
  text "CLK" at 11.573,31.168 h1.27
  text "G" at 11.557,29.79 h1.27
  text "+" at 11.684,28.575 h1.27
  text "ADC" at 13.048,26.518 h1.27 r270
  text "SCL" at 13.081,23.48 h1.27 r270
  text "TX" at 5.867,23.096 h1.27 r270
  text "5V" at 37.338,22.71 h1.27
  text "RX" at 5.867,20.767 h1.27 r270
  text "SDA" at 13.019,20.787 h1.27 r270
  text "GND" at 36.322,20.15 h1.27
  text "GND" at 5.842,18.44 h1.27 r270
  text "3.3V" at 13.065,17.995 h1.27 r270
  text "VIN_Y" at 35.687,17.293 h1.27
  text "GND" at 13.065,15.24 h1.27 r270
  text "5V" at 5.891,14.986 h1.27 r270
  text "RST" at 36.095,9.986 h1.27
Bottom Overlay:
  text "10uF" at 30.496,40.44 h1.27
  text "22uF" at 11.176,37.465 h1.27
  text "100nF" at 25.527,37.202 h1.27
  text "1uF" at 25.056,31.242 h1.27
  text "1uF" at 34.826,31.033 h1.27
  text "100nF" at 10.394,29.86 h1.27
  text "100nF" at 22.606,29.618 h1.27
  text "10" at 38.1,29.591 h1.27
  text "100nF" at 32.512,29.464 h1.27
  text "10" at 28.191,29.433 h1.27
  text "100pF" at 29.468,22.807 h1.27 r270
  text "100pF" at 19.715,22.733 h1.27 r270
  text "100pF" at 29.415,18.127 h1.27 r270